# Altium PCB PCB1.PcbDoc
Units mil, origin at the board's own origin, x right, y up, seen from the top; angles counter-clockwise.
Board outline 2045 x 2310 mil, 2 copper layers (Top Layer, Bottom Layer); 30 components, 12 nets, 89 pads, 280 vias.
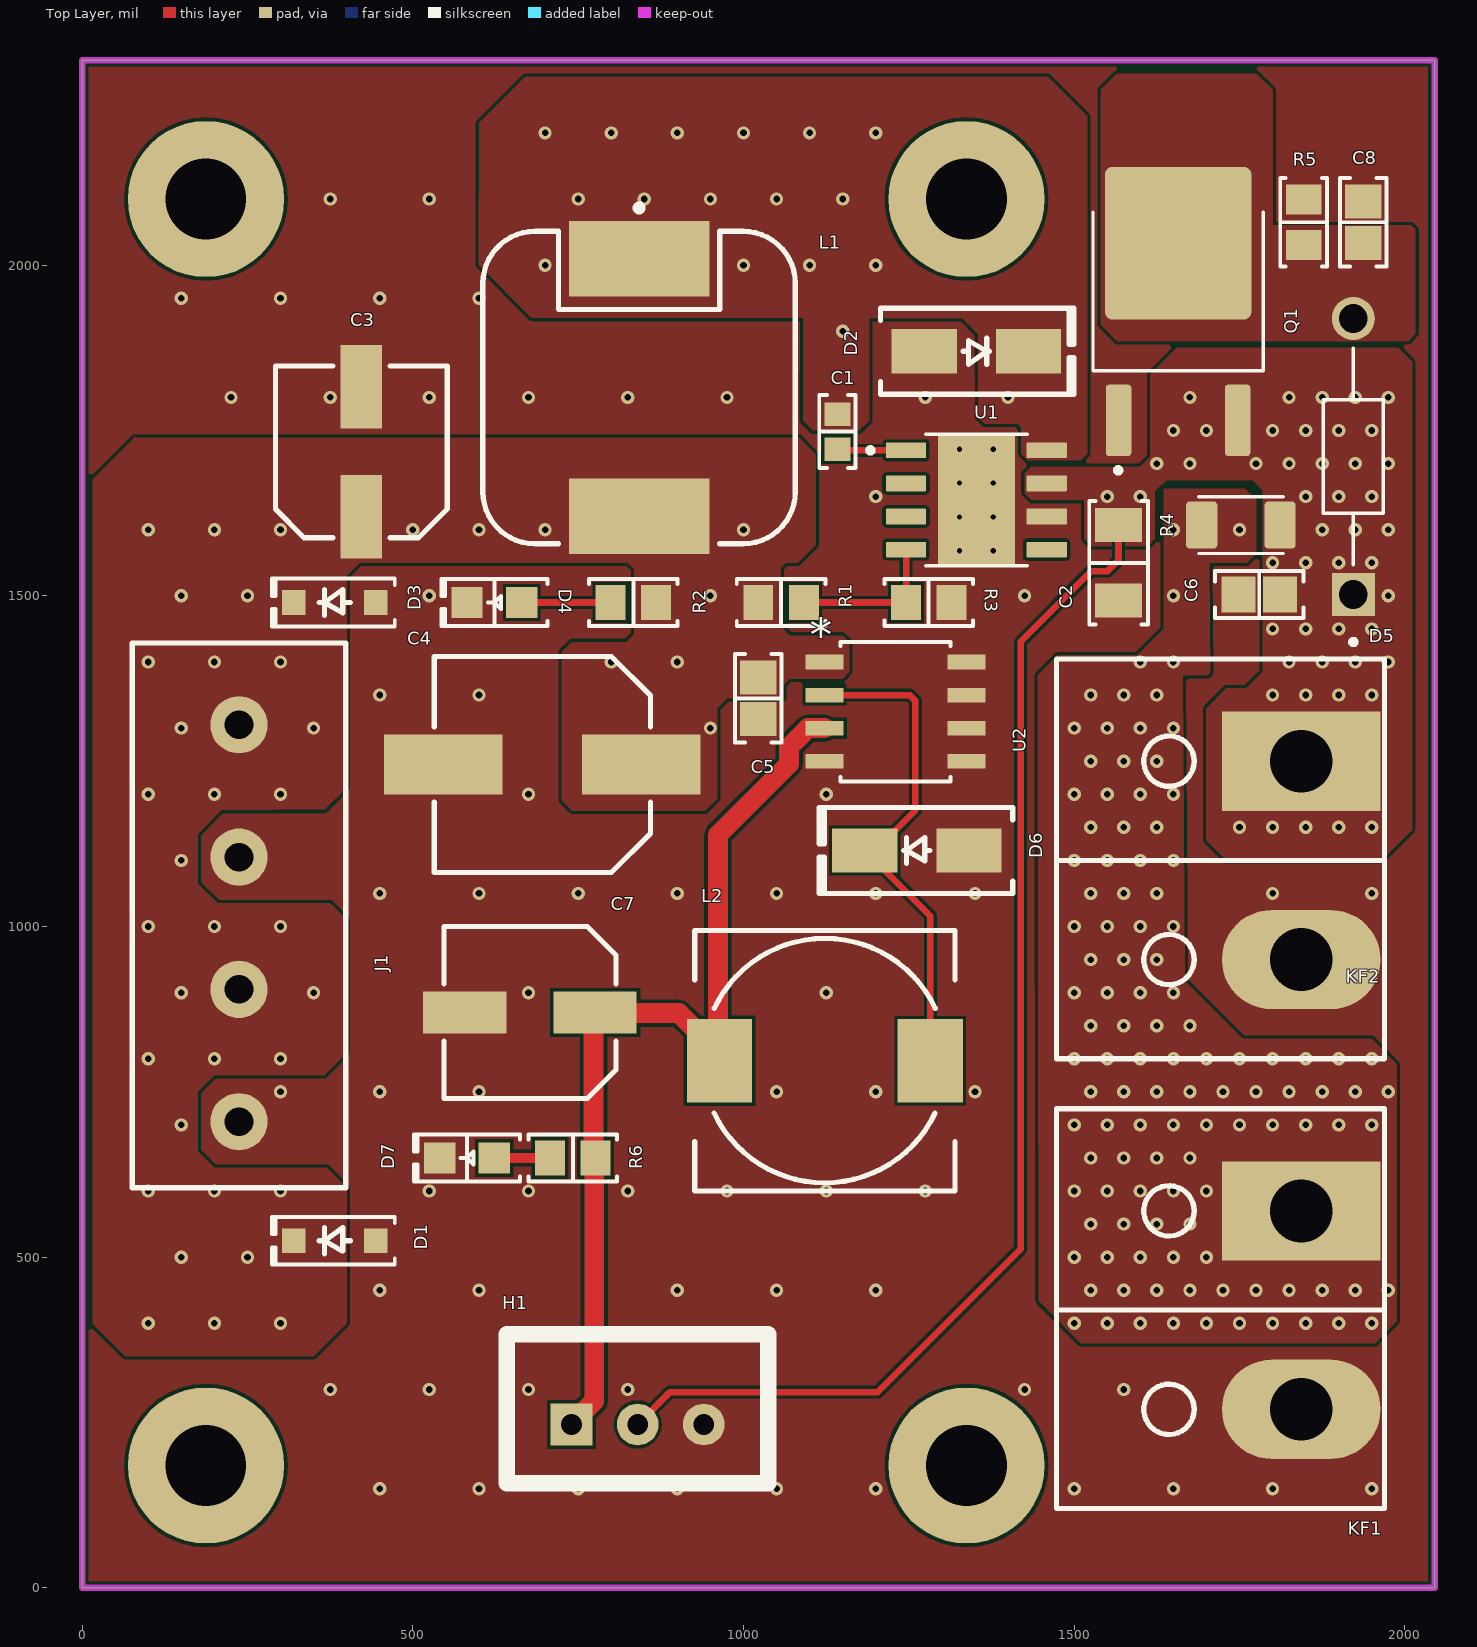
[diagram p0: Top Layer view]
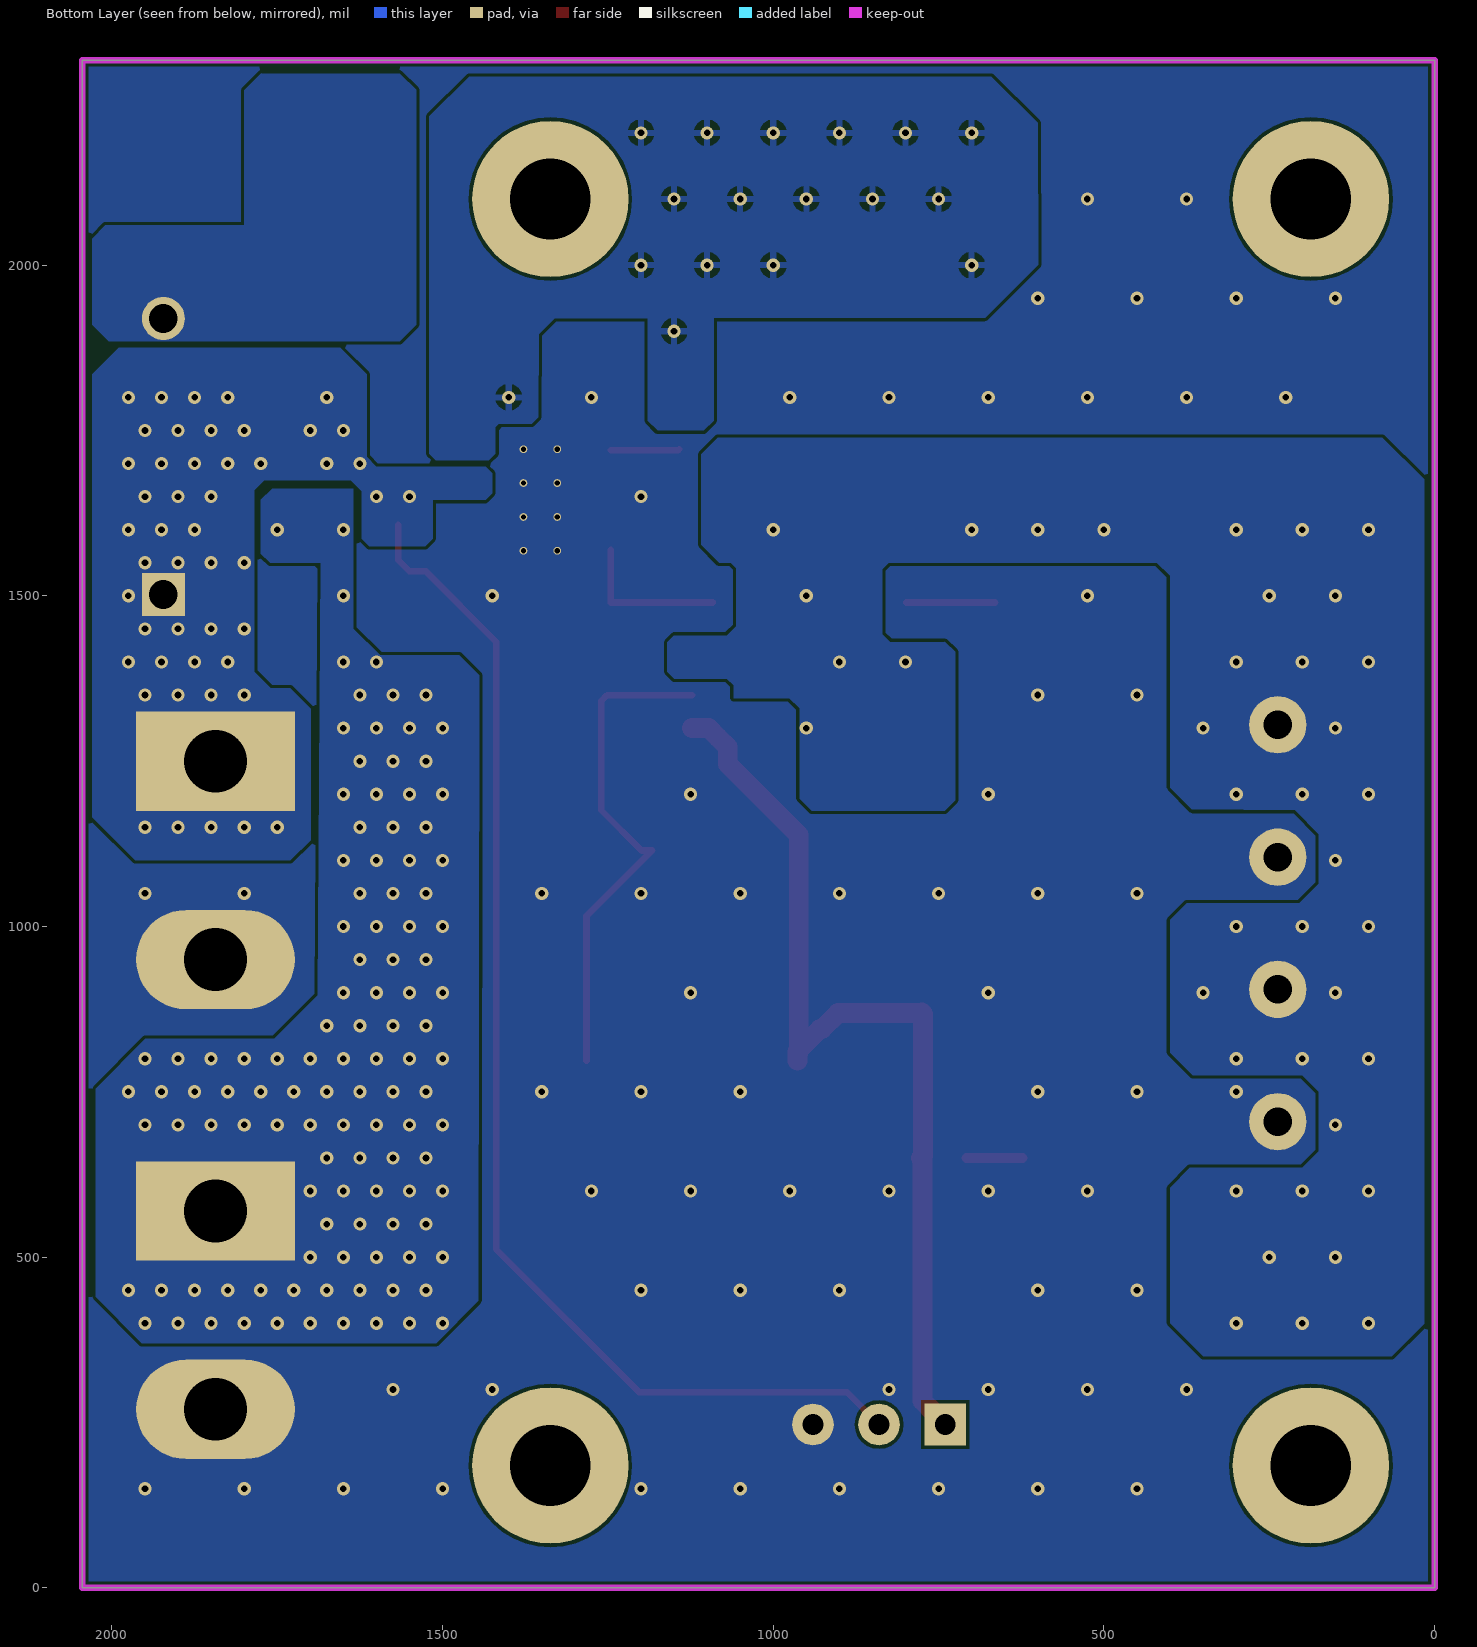
[diagram p1: Bottom Layer view, seen from below]
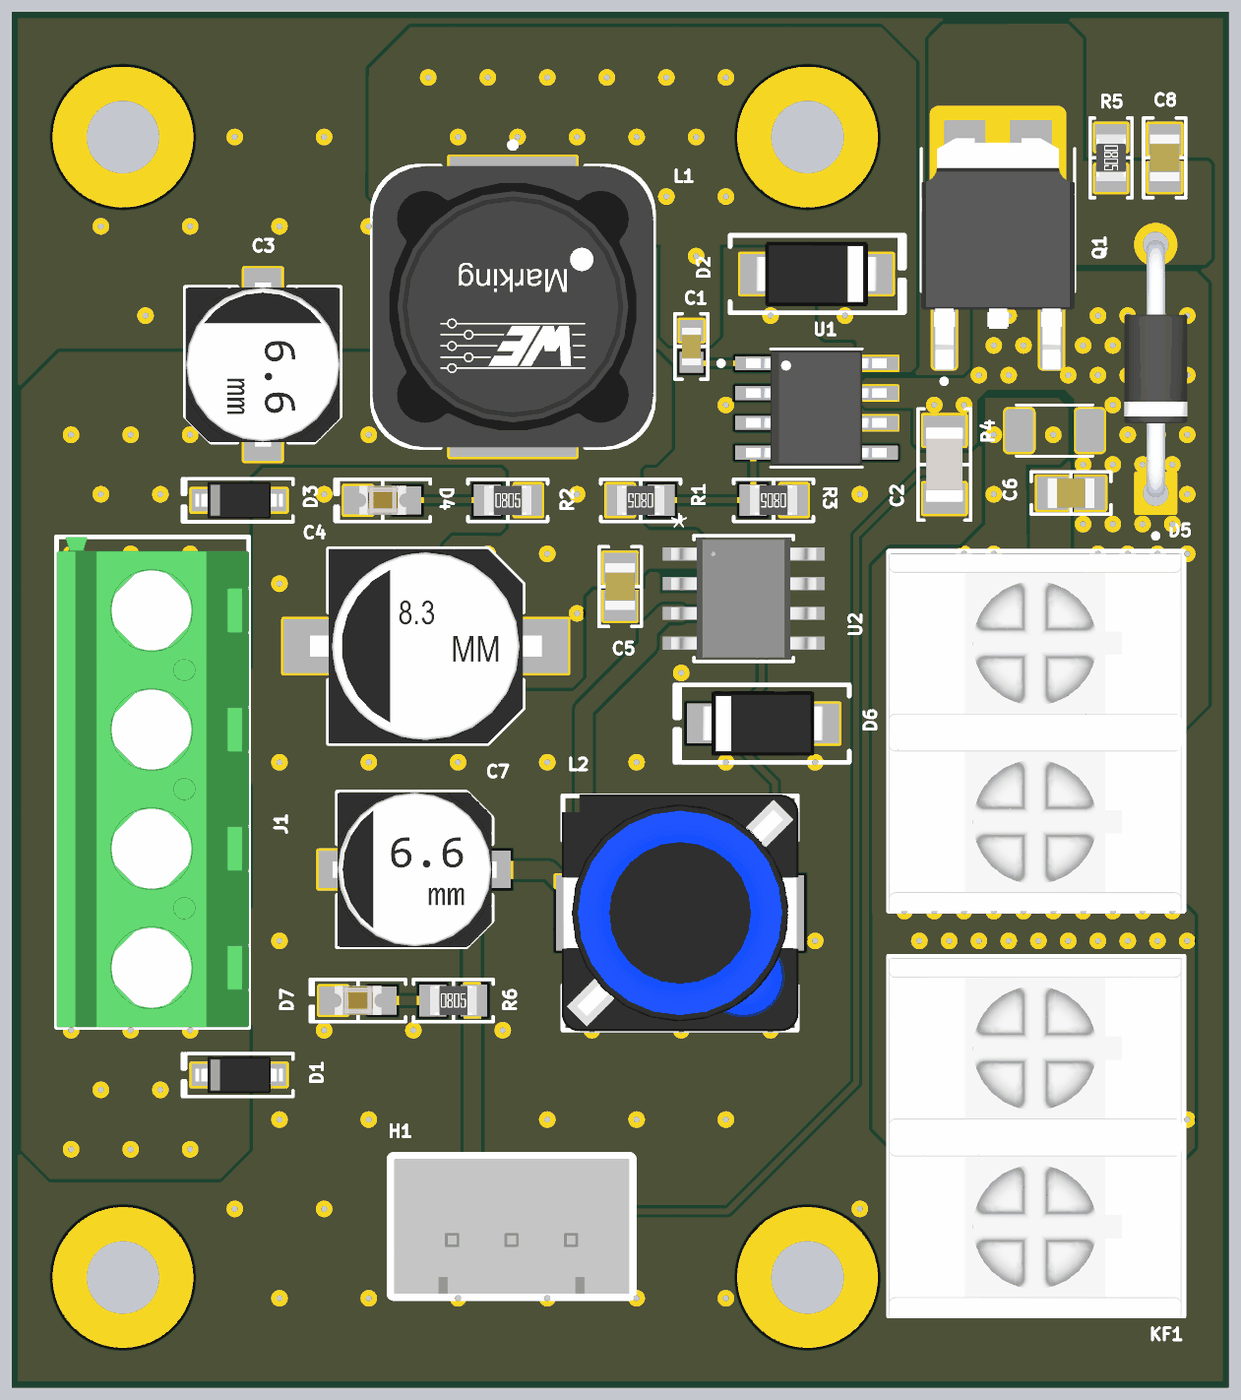
[diagram p2: 3D render of the assembled board from above, using the file's embedded part models]

## Layer stack, top to bottom
Top Solder: solder mask 0.4, Solder Resist, Dk 3.5
Top Layer: signal copper 1.4
Dielectric 1: dielectric 12.6, FR-4, Dk 4.8
Bottom Layer: signal copper 1.4
Bottom Solder: solder mask 0.4, Solder Resist, Dk 3.5

## Board outline
0,0 2045,0 2045,2310 0,2310

## Design rules (kind name [scope] priority, off if disabled: settings)
Clearance [All] p1: gap=5 ignorepadtopadclearanceinfootprint=FALSE
PolygonConnect PolygonConnect_17 [All vs IsNamedPolygon('GND_L02_P017')] p1: connectstyle=Direct reliefconductorwidth=10 reliefentries=4 polygonreliefangle="90 Angle" airgapwidth=10
PolygonConnect PolygonConnect_16 [All vs IsNamedPolygon('GND_L01_P016')] p2: connectstyle=Direct reliefconductorwidth=10 reliefentries=4 polygonreliefangle="90 Angle" airgapwidth=10
PolygonConnect PolygonConnect_15 [All vs IsNamedPolygon('NETD6_2_L01_P015')] p3: connectstyle=Direct reliefconductorwidth=10 reliefentries=4 polygonreliefangle="90 Angle" airgapwidth=10
PolygonConnect PolygonConnect_14 [All vs IsNamedPolygon('+25_L02_P013')] p4: connectstyle=Direct reliefconductorwidth=10 reliefentries=4 polygonreliefangle="90 Angle" airgapwidth=10
PolygonConnect PolygonConnect_13 [All vs IsNamedPolygon('+25_L01_P012')] p5: connectstyle=Direct reliefconductorwidth=10 reliefentries=4 polygonreliefangle="90 Angle" airgapwidth=10
PolygonConnect PolygonConnect_12 [All vs IsNamedPolygon('+25_V_L02_P011')] p6: connectstyle=Direct reliefconductorwidth=10 reliefentries=4 polygonreliefangle="90 Angle" airgapwidth=10
PolygonConnect PolygonConnect_11 [All vs IsNamedPolygon('+12_L02_P010')] p7: connectstyle=Direct reliefconductorwidth=10 reliefentries=4 polygonreliefangle="90 Angle" airgapwidth=10
PolygonConnect PolygonConnect_10 [All vs IsNamedPolygon('+12_L01_P009')] p8: connectstyle=Direct reliefconductorwidth=10 reliefentries=4 polygonreliefangle="90 Angle" airgapwidth=10
PolygonConnect PolygonConnect_9 [All vs IsNamedPolygon('NETC1_2_L01_P007')] p9: connectstyle=Direct reliefconductorwidth=10 reliefentries=4 polygonreliefangle="90 Angle" airgapwidth=10
PolygonConnect PolygonConnect_8 [All vs IsNamedPolygon('NETC1_2_L01_P005')] p10: connectstyle=Direct reliefconductorwidth=10 reliefentries=4 polygonreliefangle="90 Angle" airgapwidth=10
PolygonConnect PolygonConnect_7 [All vs IsNamedPolygon('NETC8_2_L02_P004')] p11: connectstyle=Direct reliefconductorwidth=10 reliefentries=4 polygonreliefangle="90 Angle" airgapwidth=10
PolygonConnect PolygonConnect_6 [All vs IsNamedPolygon('+25_V_L02_P002')] p12: connectstyle=Direct reliefconductorwidth=10 reliefentries=4 polygonreliefangle="90 Angle" airgapwidth=10
PolygonConnect PolygonConnect_5 [All vs IsNamedPolygon('+25_V_L02_P002')] p13: connectstyle=Direct reliefconductorwidth=10 reliefentries=4 polygonreliefangle="90 Angle" airgapwidth=10
PolygonConnect PolygonConnect_4 [All vs IsNamedPolygon('NETC8_2_L01_P003')] p14: connectstyle=Direct reliefconductorwidth=10 reliefentries=4 polygonreliefangle="90 Angle" airgapwidth=10
PolygonConnect PolygonConnect_3 [All vs IsNamedPolygon('+25_V_L02_P002')] p15: connectstyle=Direct reliefconductorwidth=10 reliefentries=4 polygonreliefangle="90 Angle" airgapwidth=10
PolygonConnect PolygonConnect_2 [All vs IsNamedPolygon('+25_V_L02_P001')] p16: connectstyle=Direct reliefconductorwidth=10 reliefentries=4 polygonreliefangle="90 Angle" airgapwidth=10
PolygonConnect PolygonConnect_1 [All vs IsNamedPolygon('+25_V_L01_P000')] p17: connectstyle=Direct reliefconductorwidth=10 reliefentries=4 polygonreliefangle="90 Angle" airgapwidth=10
PolygonConnect [All] p18: connectstyle=Relief reliefconductorwidth=10 reliefentries=4 polygonreliefangle="90 Angle" airgapwidth=10
RoutingVias [All] p1: holewidth=10 width=25 viastyle="Through Hole" minholewidth=5 minwidth=10 maxholewidth=15 maxwidth=50
SolderMaskExpansion [All] p1: expansion=4 istentingtop=FALSE
Width [All] p1: maxlimit=50 minlimit=7 preferedwidth=10 minimp=50.000000 maximp=50.000000 favimp=50.000000
30 further rules are at their usual default settings.

## Components (designator, comment, footprint, x,y, rotation, side; value= is the part's Value field where it differs from the comment)
C1 "10000 pF" "CAP 0603_1608" 1142.11,1748.28 r90 top
C2 "10 µF" "CAP 1206_3216 - 0.8MM" 1567.11,1549.94 r90 top
C3 "220 µF" "CAP ALSMD 6.6MM H6.1MM" 422.11,1717.77 r90 top
C4 "470 µF" "CAP ALSMD 8.3MM H10.5MM" 695.8,1244.94 r180 top
C5 "1 µF" "CAP 0805_2012" 1022.34,1345 r90 top
C6 "0.1µF" "CAP 0805_2012" 1779.87,1502.02 r0 top
C7 "180 µF" "CAP ALSMD 6.6MM H8.0MM" 677.11,869.94 r180 top
C8 "0.1µF" "CAP 0805_2012" 1937.11,2064.94 r270 top
D1 "1N5819HW-7-F" SOD-123 382.11,524.94 r180 top
D2 "SS34-HF" "DO214AC SMA" 1352.11,1869.94 r0 top
D3 "1N5819HW-7-F" SOD-123 382.11,1489.94 r180 top
D4 "Red" "LED 0805_2012 RED" 623.45,1489.94 r180 top
D5 "1N4750A" DIOAD1060W70L435D230 1922.11,1710.68 r90 top
D6 "SS24-HF" "DO214AC SMA" 1262.11,1114.94 r180 top
D7 "Red" "LED 0805_2012 RED" 581.9,649.94 r180 top
H1 "Header 3P 2.54 Duc Thang" XH2.54M-3 740,247 r0 top
J1 "282837-4" "TE 282837-4" 237.11,1004.94 r90 top
KF1 "CON 2 KF7.62" "CON 2 KF7.62" 1843.37,567.94 r270 top
KF2 "CON 2 KF7.62" "CON 2 KF7.62" 1843.37,1247.94 r270 top
L1 "22 µH" "WURTH WE-PD 1260" 842.11,1814.94 r270 top
L2 "68 µH" "TDK SLF10145" 1123,797 r0 top
Q1 "TN815-600B-TR" DPAK228P987X240-3N 1657.11,1929.94 r0 top
R1 "10 kOhms" "RES 0805_2012" 1056.79,1489.94 r180 top
R2 "680 Ohms" "RES 0805_2012" 833.59,1489.94 r0 top
R3 "1.1 kOhms" "RES 0805_2012" 1280,1490 r180 top
R4 "0ZCJ0020FF2E" RESC3216X125N 1752.11,1607.02 r0 top
R5 "1 kOhms" "RES 0805_2012" 1847.11,2064.94 r270 top
R6 "680 Ohms" "RES 0805_2012" 742.06,649.94 r0 top
U1 "TPS5430DDAR" CONV_TPS5430DDAR 1352.11,1644.94 r0 top
U2 "XL1509-5.0" SOP8SOIC-8_UMW 1229.86,1324.94 r0 top

## Footprints (in the part's own frame and the unit in brackets; to place one, negate y for a bottom-side part, rotate by r counter-clockwise, add the part's x,y. Pads: shape width x height; smd on the part's side, far side on the other; paste and mask are expansions set on the pad)
"CAP 0603_1608" [mm] "Chip Capacitor, 2-Leads, Body 1.60x0.80mm, IPC Medium Density"
  rect 0.9x1 smd: 1(-0.675,0) 2(0.675,0)
  silkscreen extent -1.4,-0.7 1.4,0.7, body extent -0.8,-0.41 0.8,0.41, height 0.82
"CAP 0805_2012" [mm] "Chip Capacitor, 2-Leads, Body 2.00x1.20mm, IPC Medium Density"
  rect 1.3x1.4 smd: 1(-0.8,0) 2(0.8,0)
  silkscreen extent -1.7,-0.9 1.7,0.9, body extent -1,-0.64 1,0.64, height 1.26
"CAP 1206_3216 - 0.8MM" [mm] "Chip Capacitor, 2-Leads, Body 3.25x1.60mm, IPC Medium Density"
  rect 1.3x1.8 smd: 1(-1.45,0) 2(1.45,0)
  silkscreen extent -2.37,-1.12 2.37,1.12, body extent -1.6,-0.8 1.6,0.8, height 0.8
"CAP ALSMD 6.6MM H6.1MM" [mm] "Aluminum Electrolytic Capacitor, Body 6.60x6.60x6.10mm, IPC Low Density"
  rect 3.2x1.6 smd: 1(-2.5,0) 2(2.5,0)
  silkscreen extent -3.3,-3.3 3.3,3.3, body extent -3.5,-3.3 3.5,3.3, height 6.1
"CAP ALSMD 6.6MM H8.0MM" [mm] "Aluminum Electrolytic Capacitor, Body 6.60x6.60x8.0mm, IPC Low Density"
  rect 3.2x1.6 smd: 1(-2.5,0) 2(2.5,0)
  silkscreen extent -3.3,-3.3 3.3,3.3, body extent -3.5,-3.3 3.5,3.3, height 8
"CAP ALSMD 8.3MM H10.5MM" [mm] "Aluminum Electrolytic Capacitor, Body 8.30x8.30x10.50mm, IPC Low Density"
  rect 4.55x2.3 smd: 1(-3.8,0) 2(3.8,0)
  silkscreen extent -4.15,-4.15 4.15,4.15, body extent -4.95,-4.15 4.95,4.15, height 10.5
"CON 2 KF7.62" [mil]
  rect 150x240 hole 95: 1(-2,0)
  oval 150x240 hole 95: 2(298,0)
  silkscreen extent -157,-370 448,126, body extent -152,-370 448,122, height 493
CONV_TPS5430DDAR [mm]
  rrect10% 1.55x0.6 smd mask+0: 1(-2.7,1.905) 2(-2.7,0.635) 3(-2.7,-0.635) 4(-2.7,-1.905) 5(2.7,-1.905) 6(2.7,-0.635) 7(2.7,0.635) 8(2.7,1.905)
  rect 2.95x4.9 smd paste-3 mask+0: 9(0,0)
  round 0.3 hole 0.2 mask+0: 10(-0.65,1.95) 11(0.65,1.95) 12(-0.65,0.65) 13(0.65,0.65) 14(-0.65,-0.65) 15(0.65,-0.65) 16(-0.65,-1.95) 17(0.65,-1.95)
  silkscreen extent -4.17,-2.52 1.95,2.52, body extent -3,-2.45 3,2.45, height 1.7
DIOAD1060W70L435D230 [mm]
  round 1.65 hole 1.1: A(5.3,0)
  rect 1.65x1.65 hole 1.1: C(-5.3,0)
  silkscreen extent -7.22,-1.15 4.16,1.15, body extent -5.47,-1.35 5.47,1.35, height 2.69
"DO214AC SMA" [mm] "Molded Diode, 2-Leads, Body 4.30x2.60mm, IPC Medium Density"
  rect 2.5x1.7 smd: 1(-2,0) 2(2,0)
  silkscreen extent -3.68,-1.65 3.75,1.65, body extent -2.6,-1.37 2.6,1.37, height 2.4
DPAK228P987X240-3N [mm]
  rrect25% 0.98x2.74 smd: 1(-2.286,-4.18) 2(2.286,-4.18)
  rrect10% 5.63x5.86 smd paste-4: 3(0,2.62)
  silkscreen extent -3.27,-6.2 3.27,3.83, body extent -3.27,-5.6 3.27,4.27, height 2.4
"LED 0805_2012 RED" [mm] "Chip Diode, 2-Leads, Body 2.00x1.25mm, IPC Medium Density"
  rect 1.2x1.2 smd: 1(-1.05,0) 2(1.05,0)
  silkscreen extent -2.03,-0.9 2.03,0.9, body extent -1,-0.62 1,0.63, height 0.9
"RES 0805_2012" [mm] "Chip Resistor, 2-Leads, Body 2.00x1.25mm, IPC Medium Density"
  rect 1.15x1.35 smd: 1(-0.875,0) 2(0.875,0)
  silkscreen extent -1.7,-0.9 1.7,0.9, body extent -1,-0.62 1,0.63, height 0.6
RESC3216X125N [mm]
  rrect25% 1.2x1.82 smd: 1(-1.505,0) 2(1.505,0)
  silkscreen extent -1.63,-1.09 1.63,1.09
SOD-123 [mm] "SOD, 2-Leads, Body 1.55x3.70mm, IPC Medium Density"
  rect 0.9x0.95 smd: 1(-1.575,0) 2(1.575,0)
  silkscreen extent -2.3,-0.92 2.41,0.92, body extent -1.86,-0.78 1.86,0.77, height 1.35
SOP8SOIC-8_UMW [mil]
  rect 57.5x22 smd paste+0 mask+0: 1(-107.25,75) 2(-107.25,25) 3(-107.25,-25) 4(-107.25,-75) 5(107.25,-75) 6(107.25,-25) 7(107.25,25) 8(107.25,75)
  silkscreen extent -84,-106 84,106, body extent -122,-101 122,101, height 69
"TDK SLF10145" [mm] "Precision Wire Wound Inductor, 2-Leads, Body 10.10x10.10mm, IPC Medium Density"
  rect 2.5x3.2 smd: 1(-4.05,0) 2(4.05,0)
  silkscreen extent -5,-5 5,5, body extent -5.05,-5.05 5.05,5.05, height 4.53
"TE 282837-4" [mm] "Wire to Board Terminal Block Horizontal with Board, 4 Postions, Body 20.92x8.2mm, Pitch 5.08mm"
  round 2.2 hole 1.1: 1(-7.62,0) 2(-2.54,0) 3(2.54,0) 4(7.62,0)
  silkscreen extent -10.16,-4.1 10.76,4.1, body extent -10.16,-4.1 10.76,4.1, height 10.3
"WURTH WE-PD 1260" [mm] "SMT Shielded Power Inductor, 2-leads, body 12x12mm"
  rect 2.9x5.4 smd: 1(-4.95,0) 2(4.95,0)
  silkscreen extent -7.02,-6 6,6, body extent -6,-6 6,6, height 5.66
XH2.54M-3 [mm]
  rect 1.6x1.6 hole 0.8: 1(0,0)
  round 1.6 hole 0.8: 2(2.54,0) 3(5.08,0)
  silkscreen extent -2.48,-2.26 7.56,3.46, body extent -2.48,-2.26 7.56,3.48, height 6.91

## Part data
C1: library part C0603C103K4REC7867, "CAP CER 0603 10NF 16V X7R 10%", Device Package="0603 (1608 Metric)", Manufacturer=KEMET, Operating Temperature="-55°C ~ 125°C", Supplier Part Number 1=399-C0603C103K4REC7867CT-ND, Temperature Coefficient=X7R, Tolerance=±10%, Voltage - Rated=16V, Applications="ESD Protection", Capacitance="10000 pF", componentlink1description=Datasheet, componentlink1url=https://api.kemet.com/component-edge/download/datasheet/C0603C103K4REC7867.pdf, componentlink2description="DigiKey Link", componentlink2url=https://www.digikey.com/en/products/detail/kemet/C0603C103K4REC7867/8643658, lastupdated="2/9/2024 8:09:56 PM", Lifecycle Status=Active, Minimum Order=1, Mounting Type="Surface Mount, MLCC", Package / Case="0603 (1608 Metric)", packaging=TapeAndReel, Part Number=C0603C103K4REC7867, Part Status=Active, partid=34998, Price=0.01, series="ESD SMD Comm X7R", Size / Dimension="0.063\" L x 0.031\" W (1.60mm x 0.80mm)", Supplier 1=DigiKey, Thickness (Max)="0.034\" (0.87mm)"
C2: library part 885012108022, "CAP CER 10UF 50V X5R 1206", Device Package="1206 (3216 Metric)", Manufacturer="Würth Elektronik", Operating Temperature="-55°C ~ 85°C", Supplier Part Number 1=732-885012108022CT-ND, Temperature Coefficient=X5R, Tolerance=±10%, Voltage - Rated=50V, Applications="General Purpose", Capacitance="10 µF", componentlink1description=Datasheet, componentlink1url=https://www.we-online.com/catalog/datasheet/885012108022.pdf, componentlink2description="DigiKey Link", componentlink2url=https://www.digikey.com/en/products/detail/würth-elektronik/885012108022/17829827, lastupdated="6/4/2024 7:10:08 PM", Lifecycle Status=Active, Minimum Order=1, Mounting Type="Surface Mount, MLCC", Package / Case="1206 (3216 Metric)", packaging=TapeAndReel, Part Number=885012108022, Part Status=Active, partid=49462, Price=1.51, series=WCAP-CSGP, Size / Dimension="0.126\" L x 0.063\" W (3.20mm x 1.60mm)", Supplier 1=DigiKey, Thickness (Max)="0.071\" (1.80mm)"
C3: library part EEE-FT1C221AL, "CAP ALUM 220UF 20% 16V SMD", ESR (Equivalent Series Resistance)="260mOhm @ 100kHz", Lifetime @ Temp.="2000 Hrs @ 105°C", Manufacturer="Panasonic Electronic Components", Operating Temperature="-55°C ~ 105°C", Ratings=AEC-Q200, Ripple Current @ High Frequency="300 mA @ 100 kHz", Ripple Current @ Low Frequency="195 mA @ 120 Hz", Supplier Part Number 1=10-EEE-FT1C221ALCT-ND, Tolerance=±20%, Voltage - Rated="16 V", Applications=Automotive, Capacitance="220 µF", componentlink1description=Datasheet, componentlink1url=https://na.industrial.panasonic.com/file-download/19625, componentlink2description="DigiKey Link", componentlink2url=https://www.digikey.com/en/products/detail/panasonic-electronic-components/EEE-FT1C221AL/12459640, Height - Seated (Max)="0.240\" (6.10mm)", lastupdated="6/3/2024 8:16:06 PM", Lifecycle Status=Active, Minimum Order=1, Mounting Type="Surface Mount", packaging=TapeAndReel, Part Number=EEE-FT1C221AL, partid=28448, Polarization=Polar, Price=0.16, series="FT, Halogen Free", Size / Dimension="0.248\" Dia (6.30mm)", Supplier 1=DigiKey, Surface Mount Land Size="0.260\" L x 0.260\" W (6.60mm x 6.60mm)"
C4: library part EMZS350ARA471MHA0G, "CAP ALUM 470UF 20% 35V SMD", Device Package="Radial, Can - SMD", ESR (Equivalent Series Resistance)="80mOhm @ 100kHz", Lifetime @ Temp.="2000 Hrs @ 105°C", Manufacturer="United Chemi-Con", Operating Temperature="-55°C ~ 105°C", Ratings=AEC-Q200, Ripple Current @ High Frequency="850 mA @ 100 kHz", Ripple Current @ Low Frequency="425 mA @ 120 Hz", Supplier Part Number 1=565-5123-1-ND, Tolerance=±20%, Voltage - Rated="35 V", Applications=Automotive, Capacitance="470 µF", componentlink1description=Datasheet, componentlink1url=//media.digikey.com/pdf/Data%20Sheets/United%20Chemi-Con%20PDFs/MZS_Series_NPI.pdf, componentlink2description="DigiKey Link", componentlink2url=https://www.digikey.com/en/products/detail/united-chemi-con/EMZS350ARA471MHA0G/8637079, Height - Seated (Max)="0.413\" (10.50mm)", lastupdated="6/3/2024 8:15:48 PM", Lifecycle Status=Active, Minimum Order=1, Mounting Type="Surface Mount", Package / Case="Radial, Can - SMD", packaging=TapeAndReel, Part Number=EMZS350ARA471MHA0G, Part Status=Active, partid=7526, Polarization=Polar, Price=0.40, series="Alchip™- MZS", Size / Dimension="0.315\" Dia (8.00mm)", Supplier 1=DigiKey, Surface Mount Land Size="0.327\" L x 0.327\" W (8.30mm x 8.30mm)"
C5: library part C0805C105J4RECAUTO, "CAP CER 0805 1UF 16V X7R 5%", Device Package="0805 (2012 Metric)", Manufacturer=KEMET, Operating Temperature="-55°C ~ 125°C", Ratings=AEC-Q200, Supplier Part Number 1=399-C0805C105J4RECAUTOCT-ND, Temperature Coefficient=X7R, Tolerance=±5%, Voltage - Rated=16V, Applications="Automotive, ESD Protection", Capacitance="1 µF", componentlink1description=Datasheet, componentlink1url=https://api.kemet.com/component-edge/download/datasheet/C0805C105J4RECAUTO.pdf, componentlink2description="DigiKey Link", componentlink2url=https://www.digikey.com/en/products/detail/kemet/C0805C105J4RECAUTO/8646570, lastupdated="2/9/2024 8:15:08 PM", Lifecycle Status=Active, Minimum Order=1, Mounting Type="Surface Mount, MLCC", Package / Case="0805 (2012 Metric)", packaging=TapeAndReel, Part Number=C0805C105J4RECAUTO, Part Status=Active, partid=32406, Price=0.05, series="ESD SMD Auto X7R", Size / Dimension="0.079\" L x 0.049\" W (2.00mm x 1.25mm)", Supplier 1=DigiKey, Thickness (Max)="0.055\" (1.40mm)"
C6 C8: library part 0805DD104KAT2A, "CAP CER 0.1UF 35V X5R 0805", Device Package="0805 (2012 Metric)", Manufacturer="AVX Corporation", Operating Temperature="-55°C ~ 85°C", Supplier Part Number 1=478-0805DD104KAT2ACT-ND, Temperature Coefficient=X5R, Tolerance=±10%, Voltage - Rated=35V, Applications="General Purpose", Capacitance=0.1µF, componentlink1description=Datasheet, componentlink1url=http://datasheets.avx.com/cx5r.pdf, componentlink2description="DigiKey Link", componentlink2url=http://digikey.com/product-detail/en/avx-corporation/0805DD104KAT2A/478-0805DD104KAT2ACT-ND/11570416, lastupdated="9/2/2020 1:04:04 AM", Lifecycle Status=Active, Minimum Order=1, Mounting Type="Surface Mount, MLCC", Package / Case="0805 (2012 Metric)", packaging=TapeAndReel, Part Number=0805DD104KAT2A, Part Status=Active, partid=27785, Price=0.04, series=-, Supplier 1=DigiKey
C7: library part EEE-FKE181XSP, "CAP ALUM 180UF 20% 25V SMD", Device Package="Radial, Can - SMD", ESR (Equivalent Series Resistance)="340mOhm @ 100kHz", Lifetime @ Temp.="2000 Hrs @ 105°C", Manufacturer="Panasonic Electronic Components", Operating Temperature="-55°C ~ 105°C", Ratings=AEC-Q200, Ripple Current @ High Frequency="280 mA @ 100 kHz", Ripple Current @ Low Frequency="182 mA @ 120 Hz", Supplier Part Number 1=P18956CT-ND, Tolerance=±20%, Voltage - Rated="25 V", Applications=Automotive, Capacitance="180 µF", componentlink1description=Datasheet, componentlink1url=https://b2b-api.panasonic.eu/file_stream/pids/fileversion/3102, componentlink2description="DigiKey Link", componentlink2url=https://www.digikey.com/en/products/detail/panasonic-electronic-components/EEE-FKE181XSP/5805038, Height - Seated (Max)="0.315\" (8.00mm)", lastupdated="6/3/2024 8:16:27 PM", Lifecycle Status=Active, Minimum Order=1, Mounting Type="Surface Mount", Package / Case="Radial, Can - SMD", packaging=TapeAndReel, Part Number=EEE-FKE181XSP, Part Status=Active, partid=27654, Polarization=Polar, Price=0.22, series=FKS, Size / Dimension="0.248\" Dia (6.30mm)", Supplier 1=DigiKey, Surface Mount Land Size="0.260\" L x 0.260\" W (6.60mm x 6.60mm)"
D1 D3: "DIODE SCHOTTKY 40V 1A SOD123", Capacitance @ Vr, F="60pF @ 4V, 1MHz", Current - Average Rectified (Io)=1A, Current - Reverse Leakage @ Vr="1 mA @ 40 V", Manufacturer="Diodes Incorporated", Operating Temperature - Junction="-65°C ~ 125°C", Package / Case=SOD-123, Supplier Part Number 1=1N5819HW-FDICT-ND, Voltage - DC Reverse (Vr) (Max)="40 V", Voltage - Forward (Vf) (Max) @ If="450 mV @ 1 A", componentlink1description=Datasheet, componentlink1url=https://www.diodes.com/assets/Datasheets/ds30217.pdf, componentlink2description="DigiKey Link", componentlink2url=https://www.digikey.com/en/products/detail/diodes-incorporated/1N5819HW-7-F/814970, Diode Type=Schottky, lastupdated="6/3/2024 7:54:46 PM", Lifecycle Status=Active, Minimum Order=1, Mounting Type="Surface Mount", packaging=TapeAndReel, Part Number=1N5819HW-7-F, Part Status=Active, partid=2212, Price=0.05, series=-, Speed="Fast Recovery =< 500ns, > 200mA (Io)", Supplier 1=DigiKey, Supplier Device Package=SOD-123
D2: "DIODE SCHOTTKY 40V 3A DO214AC", Capacitance @ Vr, F="450pF @ 4V, 1MHz", Current - Average Rectified (Io)=3A, Current - Reverse Leakage @ Vr="500 µA @ 40 V", Manufacturer="Comchip Technology", Operating Temperature - Junction="-55°C ~ 125°C", Package / Case="DO-214AC, SMA", Supplier Device Package="DO-214AC (SMA)", Supplier Part Number 1=641-2115-1-ND, Voltage - DC Reverse (Vr) (Max)="40 V", Voltage - Forward (Vf) (Max) @ If="550 mV @ 3 A", componentlink1description=Datasheet, componentlink1url=http://www.comchiptech.com/admin/files/product/20190514101641.pdf, componentlink2description="DigiKey Link", componentlink2url=https://www.digikey.com/en/products/detail/comchip-technology/SS34-HF/10279693, Diode Type=Schottky, lastupdated="6/3/2024 7:54:30 PM", Lifecycle Status=Active, Minimum Order=1, Mounting Type="Surface Mount", packaging=TapeAndReel, Part Number=SS34-HF, Part Status=Active, partid=2138, Price=0.07, series=-, Speed="Fast Recovery =< 500ns, > 200mA (Io)", Supplier 1=DigiKey
D4 D7: library part B1701URO-20D000114U1930, "LED RED DIFFUSED 0805 SMD", Current - Test=20mA, Device Package="0805 (2012 Metric)", Manufacturer="Harvatek Corporation", Millicandela Rating=71.5mcd, Supplier Device Package=0805, Supplier Part Number 1=3147-B1701URO-20D000114U1930CT-ND, Voltage - Forward (Vf) (Typ)=2V, Color=Red, componentlink1description=Datasheet, componentlink1url=https://media.digikey.com/pdf/Data%20Sheets/Harvatek%20PDFs/B1701URO-20D000114U1930.pdf, componentlink2description="DigiKey Link", componentlink2url=https://www.digikey.com/en/products/detail/harvatek-corporation/B1701URO-20D000114U1930/16671739, Height (Max)=0.90mm, lastupdated="6/3/2024 8:00:05 PM", Lens Size="1.40mm x 1.30mm", Lens Style="Rectangle with Flat Top", Lens Transparency=Diffused, Lifecycle Status=Active, Minimum Order=1, Mounting Type="Surface Mount", Package / Case="0805 (2012 Metric)", packaging=TapeAndReel, Part Number=B1701URO-20D000114U1930, Part Status=Active, partid=1175, Price=0.09, series=B1701URO, Size / Dimension="2.00mm L x 1.30mm W", Supplier 1=DigiKey, Viewing Angle=130°, Wavelength - Dominant=631nm, Wavelength - Peak=639nm
D5: "1N4750 Series 1 W 27 V 5 uA Through Hole Zener Diode - DO-41", Package="DO-41 ON Semiconductor", Availability="In Stock", Check_prices=https://www.snapeda.com/parts/1N4750A/Fairchild+Semiconductor/view-part/?ref=eda, MF="Fairchild Semiconductor", MP=1N4750A, Price=None, Purchase-URL=https://pricing.snapeda.com/search/part/1N4750A/?ref=eda, SnapEDA_Link=https://www.snapeda.com/parts/1N4750A/Fairchild+Semiconductor/view-part/?ref=snap
D6: "DIODE SCHOTTKY 40V 2A DO214AC", Capacitance @ Vr, F="220pF @ 4V, 1MHz", Current - Average Rectified (Io)=2A, Current - Reverse Leakage @ Vr="500 µA @ 40 V", Manufacturer="Comchip Technology", Operating Temperature - Junction="-55°C ~ 150°C", Package / Case="DO-214AC, SMA", Supplier Device Package="DO-214AC (SMA)", Supplier Part Number 1=641-SS24-HFCT-ND, Voltage - DC Reverse (Vr) (Max)="40 V", Voltage - Forward (Vf) (Max) @ If="550 mV @ 2 A", componentlink1description=Datasheet, componentlink1url=http://www.comchiptech.com/admin/files/product/20190621155523.PDF, componentlink2description="DigiKey Link", componentlink2url=https://www.digikey.com/en/products/detail/comchip-technology/SS24-HF/10443640, Diode Type=Schottky, lastupdated="6/3/2024 7:54:32 PM", Lifecycle Status=Active, Minimum Order=1, Mounting Type="Surface Mount", packaging=TapeAndReel, Part Number=SS24-HF, Part Status=Active, partid=2029, Price=0.05, series=-, Speed="Fast Recovery =< 500ns, > 200mA (Io)", Supplier 1=DigiKey
H1 KF1 KF2: "Cắm", Chung_Loai=Cắm, Don_Vi=Con
  H1: Ma_Hang=MH001292, Ten_Linh_Kien="Header 3P XH2.54-3P Đực Thẳng"
  KF1 KF2: Ma_Hang=MH002053, Ten_Linh_Kien="CON 2 KF7.62-2P 7.62MM (Đen Thẳng)"
J1: "TERM BLK 4P SIDE ENT 5.08MM PCB", Color=Green, Current="13.5 A", Manufacturer="TE Connectivity AMP Connectors", Supplier Part Number 1=A124423-ND, Voltage="300 V", componentlink1description=Datasheet, componentlink1url=https://www.te.com/commerce/DocumentDelivery/DDEController?Action=srchrtrv&DocNm=282837&DocType=Customer+Drawing&DocLang=English, componentlink2description="DigiKey Link", componentlink2url=https://www.digikey.com/en/products/detail/te-connectivity-amp-connectors/282837-4/2187975, Features="Interlocking (Side)", lastupdated="6/21/2022 3:00:53 PM", Lifecycle Status=Active, Mating Orientation="Horizontal with Board", Minimum Order=1, Mounting Type="Through Hole", Number of Levels=1, packaging=Tray, Part Number=282837-4, Part Status=Active, Pitch="0.200\" (5.08mm)", Positions Per Level=4, Price=0.62, series=Buchanan, Supplier 1=DigiKey, Wire Gauge="16-28 AWG", Wire Termination="Screw - Rising Cage Clamp"
L1: library part 744771122, "FIXED IND 22UH 3.37A 36 MOHM SMD", Current - Saturation=3.77A, Current Rating (Amps)="3.37 A", DC Resistance (DCR)="36mOhm Max", Device Package=Nonstandard, Frequency - Self Resonant=13.5MHz, Inductance Frequency - Test="1 kHz", Manufacturer="Würth Elektronik", Operating Temperature="-40°C ~ 125°C", Ratings=AEC-Q200, Supplier Part Number 1=732-1211-1-ND, Tolerance=±20%, componentlink1description=Datasheet, componentlink1url=https://katalog.we-online.de/pbs/datasheet/744771122.pdf, componentlink2description="DigiKey Link", componentlink2url=https://www.digikey.com/en/products/detail/würth-elektronik/744771122/1638616, Height - Seated (Max)="0.236\" (6.00mm)", Inductance="22 µH", lastupdated="6/3/2024 8:26:19 PM", Lifecycle Status=Active, Material - Core=Ferrite, Minimum Order=1, Mounting Type="Surface Mount", Package / Case=Nonstandard, packaging=TapeAndReel, Part Number=744771122, Part Status=Active, partid=5724, Price=1.18, series=WE-PD, Shielding=Shielded, Size / Dimension="0.472\" L x 0.472\" W (12.00mm x 12.00mm)", Supplier 1=DigiKey, Type="Drum Core, Wirewound"
L2: library part SLF10145T-680M1R2-PF, "FIXED IND 68UH 1.3A 168 MOHM SMD", Current - Saturation=1.2A, Current Rating (Amps)="1.3 A", DC Resistance (DCR)="168mOhm Max", Device Package=Nonstandard, Inductance Frequency - Test="1 kHz", Manufacturer="TDK Corporation", Operating Temperature="-40°C ~ 105°C", Supplier Part Number 1=445-1987-1-ND, Tolerance=±20%, componentlink1description=Datasheet, componentlink1url=https://product.tdk.com/info/en/catalog/datasheets/inductor_commercial_power_slf10145_en.pdf?ref_disty=digikey, componentlink2description="DigiKey Link", componentlink2url=https://www.digikey.com/en/products/detail/tdk-corporation/SLF10145T-680M1R2-PF/755339, Height - Seated (Max)="0.189\" (4.80mm)", Inductance="68 µH", lastupdated="7/12/2023 8:19:31 PM", Lifecycle Status=Active, Material - Core=Ferrite, Minimum Order=1, Mounting Type="Surface Mount", Package / Case=Nonstandard, packaging=TapeAndReel, Part Number=SLF10145T-680M1R2-PF, Part Status=Active, partid=81, Price=0.44, series=SLF, Shielding=Shielded, Size / Dimension="0.398\" L x 0.398\" W (10.10mm x 10.10mm)", Supplier 1=DigiKey, Type="Drum Core, Wirewound"
Q1: "No Description Available", Mfr_Name=STMicroelectronics, RefDes=RefDes, Type=Type
R1: library part ERJ-UP6J103V, "RES 10K OHM 5% 1/2W 0805", Device Package="0805 (2012 Metric)", Manufacturer="Panasonic Electronic Components", Operating Temperature="-55°C ~ 155°C", Power (Watts)="0.5W, 1/2W", Ratings=AEC-Q200, Supplier Device Package=0805, Supplier Part Number 1=10-ERJ-UP6J103VCT-ND, Temperature Coefficient=±200ppm/°C, Tolerance=±5%, componentlink1description=Datasheet, componentlink1url=https://api.pim.na.industrial.panasonic.com/file_stream/main/fileversion/4484, componentlink2description="DigiKey Link", componentlink2url=https://www.digikey.com/en/products/detail/panasonic-electronic-components/ERJ-UP6J103V/8134737, Composition="Thick Film", Features="Anti-Sulfur, Automotive AEC-Q200, Pulse Withstanding", Height - Seated (Max)="0.028\" (0.70mm)", lastupdated="2/8/2024 9:00:07 PM", Lifecycle Status=Active, Minimum Order=1, Number of Terminations=2, Package / Case="0805 (2012 Metric)", packaging=TapeAndReel, Part Number=ERJ-UP6J103V, Part Status=Active, partid=76882, Price=0.02, Resistance="10 kOhms", series=ERJ-UP6, Size / Dimension="0.079\" L x 0.049\" W (2.00mm x 1.25mm)", Supplier 1=DigiKey
R2 R6: library part ERA-6AEB681V, "RES SMD 680 OHM 0.1% 1/8W 0805", Device Package="0805 (2012 Metric)", Manufacturer="Panasonic Electronic Components", Operating Temperature="-55°C ~ 155°C", Power (Watts)="0.125W, 1/8W", Ratings=AEC-Q200, Supplier Device Package=0805, Supplier Part Number 1=P680DACT-ND, Temperature Coefficient=±25ppm/°C, Tolerance=±0.1%, componentlink1description=Datasheet, componentlink1url=https://industrial.panasonic.com/cdbs/www-data/pdf/RDM0000/AOA0000C307.pdf, componentlink2description="DigiKey Link", componentlink2url=https://www.digikey.com/en/products/detail/panasonic-electronic-components/ERA-6AEB681V/1465744, Composition="Thin Film", Features="Automotive AEC-Q200", Height - Seated (Max)="0.024\" (0.60mm)", lastupdated="2/8/2024 9:00:55 PM", Lifecycle Status=Active, Minimum Order=1, Number of Terminations=2, Package / Case="0805 (2012 Metric)", packaging=TapeAndReel, Part Number=ERA-6AEB681V, Part Status=Active, partid=48903, Price=0.03, Resistance="680 Ohms", series=ERA-6A, Size / Dimension="0.079\" L x 0.049\" W (2.00mm x 1.25mm)", Supplier 1=DigiKey
R3: library part ERA-6APB112V, "RES SMD 1.1K OHM 0.1% 1/8W 0805", Device Package="0805 (2012 Metric)", Manufacturer="Panasonic Electronic Components", Operating Temperature="-55°C ~ 155°C", Power (Watts)="0.125W, 1/8W", Ratings=AEC-Q200, Supplier Device Package=0805, Supplier Part Number 1=P1.1KAZCT-ND, Temperature Coefficient=±15ppm/°C, Tolerance=±0.1%, componentlink1description=Datasheet, componentlink1url=https://industrial.panasonic.com/cdbs/www-data/pdf/RDM0000/AOA0000C307.pdf, componentlink2description="DigiKey Link", componentlink2url=https://www.digikey.com/en/products/detail/panasonic-electronic-components/ERA-6APB112V/3070681, Composition="Thin Film", Features="Automotive AEC-Q200", Height - Seated (Max)="0.024\" (0.60mm)", lastupdated="2/8/2024 9:02:01 PM", Lifecycle Status=Active, Minimum Order=1, Number of Terminations=2, Package / Case="0805 (2012 Metric)", packaging=TapeAndReel, Part Number=ERA-6APB112V, Part Status=Active, partid=36576, Price=0.15, Resistance="1.1 kOhms", series=ERA-6A, Size / Dimension="0.079\" L x 0.049\" W (2.00mm x 1.25mm)", Supplier 1=DigiKey
R4: "1206 SMT PPTC", Package="1206 Bel Fuse", Availability=Unavailable, DigiKey-Purchase-URL=https://snapeda.com/shop?store=DigiKey&id=430609, MF="Bel Fuse", MP=0ZCJ0020FF2E, Price=None, SnapEDA_Link=https://www.snapeda.com/parts/0ZCJ0020FF2E/Bel%20Fuse%20Inc./view-part/430609/?ref=snap
R5: library part CPF0805B1K0E1, "RES SMD 1K OHM 0.1% 1/10W 0805", Device Package="0805 (2012 Metric)", Manufacturer="TE Connectivity Passive Product", Operating Temperature="-55°C ~ 155°C", Power (Watts)="0.1W, 1/10W", Supplier Device Package=0805, Supplier Part Number 1=A103165CT-ND, Temperature Coefficient=±25ppm/°C, Tolerance=±0.1%, componentlink1description=Datasheet, componentlink1url=https://www.te.com/commerce/DocumentDelivery/DDEController?Action=srchrtrv&DocNm=1773200&DocType=DS&DocLang=English, componentlink2description="DigiKey Link", componentlink2url=https://www.digikey.com/en/products/detail/te-connectivity-passive-product/CPF0805B1K0E1/2382031, Composition="Thin Film", Height - Seated (Max)="0.026\" (0.65mm)", lastupdated="2/8/2024 9:00:53 PM", Lifecycle Status=Active, Minimum Order=1, Number of Terminations=2, Package / Case="0805 (2012 Metric)", packaging=TapeAndReel, Part Number=CPF0805B1K0E1, Part Status=Active, partid=49078, Price=0.12, Resistance="1 kOhms", series="CPF, Neohm", Size / Dimension="0.079\" L x 0.049\" W (2.00mm x 1.25mm)", Supplier 1=DigiKey
U1: "5.5V to 36V Input, 3A, 500kHz Step-Down Converter", Package="HSOIC-8 Texas Instruments", Availability="In Stock", Check_prices=https://www.snapeda.com/parts/TPS5430DDAR/Texas+Instruments/view-part/?ref=eda, MF="Texas Instruments", MP=TPS5430DDAR, Price=None, Purchase-URL=https://pricing.snapeda.com/search/part/TPS5430DDAR/?ref=eda, SnapEDA_Link=https://www.snapeda.com/parts/TPS5430DDAR/Texas+Instruments/view-part/?ref=snap
U2: "No Description Available", Mfr_Name="UMW(Youtai Semiconductor Co., Ltd.)", RefDes=RefDes, Type=Type

## Free pads (board coordinates)
  round 236.22 hole 122.05: 9(187.11,184.94) 9(187.11,2099.94) 9(1337.11,184.94) 9(1337.11,2099.94)

## Via types
v1: diameter 20, hole 10, Top Layer to Bottom Layer, 280 vias

## Nets (pads, with @x,y where several pads share a name; then routed paths per layer and width w, separated by ;. In a path a pad name is that pad's centre, name@x,y a point inside that pad or via, vN(x,y) a via of type N, cw(c..) or ccw(c..) an arc to the next point about the centre after c; other vN are vias at no path point)
+5: C7.1 H1.1 L2.1 R6.2 U2.3 | length 1438.2
  Top Layer w30: H1.1 756.5,263.5 756.5,264.68 774.36,282.54 774.36,647.79 R6.2 773.38,653.06 773.38,867.79 C7.1 776.51,868.97 902.24,868.97 926.22,844.99 929.34,844.99 963.55,810.78 L2.1 ; L2.1@961.4,809.81 961.4,1138.4 1068.86,1245.86 1068.86,1271.29 1083.5,1285.94 1097.51,1299.94 U2.3
+12: C3.1 C4.1 C5.2 D1.2 D3.2 J1.2 J1.4 L1.2 R1.2 R2.2 U2.1
  other v1: 100,400 200,400 300,400 150,500 250,500 100,600 200,600 300,600 150,700 100,800 200,800 300,800 150,900 350,900 100,1000 200,1000 300,1000 150,1100 100,1200 200,1200 300,1200 150,1300 350,1300 950,1300 100,1400 200,1400 300,1400 800,1400 900,1400 150,1500 250,1500 950,1500 100,1600 200,1600 300,1600 500,1600 600,1600 700,1600 1000,1600
+25: KF1.1 R4.1
  other v1: 1500,400 1550,400 1600,400 1650,400 1700,400 1750,400 1800,400 1850,400 1900,400 1950,400 1525,450 1575,450 1625,450 1675,450 1725,450 1775,450 1825,450 1875,450 1925,450 1975,450 1500,500 1550,500 1600,500 1650,500 1700,500 1525,550 1575,550 1625,550 1675,550 1500,600 1550,600 1600,600 1650,600 1700,600 1525,650 1575,650 1625,650 1675,650 1500,700 1550,700 1600,700 1650,700 1700,700 1750,700 1800,700 1850,700 1900,700 1950,700 1525,750 1575,750 1625,750 1675,750 1725,750 1775,750 1825,750 1875,750 1925,750 1975,750 1500,800 1550,800 1600,800 1650,800 1700,800 1750,800 1800,800 1850,800 1900,800 1950,800 1525,850 1575,850 1625,850 1675,850 1500,900 1550,900 1600,900 1650,900 1525,950 1575,950 1625,950 1500,1000 1550,1000 1600,1000 1650,1000 1525,1050 1575,1050 1625,1050 1500,1100 1550,1100 1600,1100 1650,1100 1525,1150 1575,1150 1625,1150 1500,1200 1550,1200 1600,1200 1650,1200 1525,1250 1575,1250 1625,1250 1500,1300 1550,1300 1600,1300 1650,1300 1525,1350 1575,1350 1625,1350 1600,1400 1650,1400 1650,1500 1650,1600 1750,1600
+25_V: C2.2 C6.2 D5.C H1.2 KF2.1 Q1.2 R4.2 U1.7 | length 1859.5
  Top Layer w10: H1.2 889,296 1203,296 1419,512 1419,1430.51 1525.84,1537.35 1550.35,1537.35 1567.11,1554.11 C2.2
  other v1: 1750,1150 1800,1150 1850,1150 1900,1150 1950,1150 1800,1350 1850,1350 1900,1350 1950,1350 1825,1400 1875,1400 1925,1400 1975,1400 1800,1450 1850,1450 1900,1450 1950,1450 1975,1500 1800,1550 1850,1550 1900,1550 1950,1550 1875,1600 1925,1600 1975,1600 1550,1650 1600,1650 1850,1650 1900,1650 1950,1650 1625,1700 1675,1700 1775,1700 1825,1700 1875,1700 1925,1700 1975,1700 1650,1750 1700,1750 1800,1750 1850,1750 1900,1750 1950,1750 1675,1800 1825,1800 1875,1800 1925,1800 1975,1800
GND: C2.1 C3.2 C4.2 C5.1 C6.1 C7.2 C8.1 D1.1 D2.1 D3.1 D4.2 D6.1 D7.2 H1.3 J1.1 J1.3 KF1.2 KF2.2 Q1.1 R3.1 R5.1 U1.6 U1.9 U1.10 U1.11 U1.12 U1.13 U1.14 U1.15 U1.16 U1.17 U2.4 U2.5 U2.6 U2.7 U2.8
  other v1: 450,150 600,150 750,150 900,150 1050,150 1200,150 1500,150 1650,150 1800,150 1950,150 375,300 525,300 675,300 825,300 1425,300 1575,300 450,450 600,450 900,450 1050,450 1200,450 525,600 675,600 825,600 975,600 1125,600 1275,600 300,750 450,750 600,750 1050,750 1200,750 1350,750 675,900 1125,900 450,1050 600,1050 750,1050 900,1050 1050,1050 1200,1050 1350,1050 1800,1050 1950,1050 675,1200 1125,1200 450,1350 600,1350 525,1500 1425,1500 1200,1650 225,1800 375,1800 525,1800 675,1800 825,1800 975,1800 1275,1800 150,1950 300,1950 450,1950 600,1950 375,2100 525,2100
NetC1_1: C1.1 U1.1 | length 104.4
  Top Layer w10: C1.1 1143.88,1719.94 U1.1
NetC1_2: C1.2 D2.2 L1.1 U1.8
  other v1: 1400,1800 1150,1900 700,2000 1000,2000 1100,2000 1200,2000 750,2100 850,2100 950,2100 1050,2100 1150,2100 700,2200 800,2200 900,2200 1000,2200 1100,2200 1200,2200
NetC8_2: C8.2 D5.A Q1.3 R5.2
NetD4_1: D4.1 R2.1 | length 134.3
  Top Layer w10: D4.1 R2.1
NetD6_2: D6.2 L2.2 U2.2 | length 767.1
  Top Layer w10: U2.2 1251.21,1349.94 1260,1341.15 1260,1175.9 1199.04,1114.94 D6.2 1282.45,1015.86 L2.2
NetD7_1: D7.1 R6.1 | length 84.4
  Top Layer w15: D7.1 R6.1
NetR1_1: R1.1 R3.2 U1.4 | length 234.4
  Top Layer w10: R1.1 1091.3,1490 R3.2 1245.81,1490.26 U1.4
pads on no net: U1.2 U1.3 U1.5

## Polygon pours and split planes (outlines as drawn)
+25_V on Bottom Layer "+25_V_L02_P011" (solid, pour order 11): 2030,1165 2030,1835 1990,1875 1655,1875 1615,1835 1615,1710 1600,1695 1435,1695 1425,1685 1425,1655 1435,1645 1515,1645 1515,1586 1526,1575 1611.02,1575 1622.09,1586.09 1621.93,1657.91 1638.98,1675 1770,1675 1785,1660 1785,1385 1760,1360 1730,1360 1699.62,1329.62 1699.62,1130.38 1730,1100 1965,1100
GND on Bottom Layer "GND_L02_P017" (solid, pour order 17): 0,0 2045,0 2045,2310 0,2310
+25 on Bottom Layer "+25_L02_P013" (solid, pour order 13): 1635,1662 1757.56,1662 1774.56,1645 1774.56,1564 1760.56,1550 1684.37,1550 1688.38,895.96 1754.75,830 1949.56,830 2024.56,755 2024.56,440 1954.56,370 1635,370 1509.61,370 1445.75,433.77 1444.58,1380 1474.56,1410.01 1594.58,1410.01 1635,1450.44
+12 on Bottom Layer "+12_L02_P010" (solid, pour order 10): 1109,1577 1109,1714 1084,1739 79,1739 16,1676 16,1550 16,1178.77 16,775 16,399 65,350 350,350 400,400 400,605 370,635 200,635 175,660 175,750 200,775 366,775 400,809 400,1010 375,1035 205,1035 175,1065 175,1139.83 210.48,1175.61 367.04,1176.93 400,1210.17 400,1530 420,1550 825,1550 835,1540 835,1441.99 823.01,1430.09 740.73,1430.69 725.13,1415.2 725.13,1190.87 741,1175 942,1175 960.2,1193.2 960.2,1329.89 975.71,1345.42 1060,1345.51 1060,1365 1070,1375 1150,1375 1159.97,1384.97 1159.97,1430.03 1150.1,1439.9 1070.1,1439.9 1056,1454 1056,1542 1064,1550 1082,1550
NetC1_2 on Bottom Layer "NETC1_2_L02_P008" (solid, pour order 8): 1510,1705 1430,1705 1420,1715 1420,1755 1414.99,1760.01 1365.03,1759.99 1355.23,1769.75 1354.69,1895.34 1330.44,1919.52 1190,1919.52 1190,1765 1175,1750 1104.99,1750 1090.03,1764.99 1090.3,1919.52 679.42,1920.49 599.62,2000.59 600.12,2215.22 670.06,2285 1354.45,2285 1420,2285 1460,2285 1520,2225 1520,1715
NetC8_2 on Bottom Layer "NETC8_2_L02_P004" (solid, pour order 4): 2005,1885 1565,1885 1540,1910 1540,2060 1540,2264.96 1564.7,2289.73 1774.17,2290.22 1800.01,2264.45 1800.01,2060 2010,2060 2030,2040 2030,1910
+25_V on Top Layer "+25_V_L01_P000" (solid, pour order 0): 2011,1146 2011,1854 1990,1875 1655,1875 1615,1835 1615,1710 1600,1695 1435,1695 1425,1685 1425,1655 1435,1645 1515,1645 1515,1586 1526,1575 1611.02,1575 1622.09,1586.09 1621.93,1657.91 1638.98,1675 1770,1675 1785,1660 1785,1385 1760,1360 1730,1360 1699.62,1329.62 1699.62,1130.38 1730,1100 1965,1100
GND on Top Layer "GND_L01_P016" (solid, pour order 16): 0,0 2045,0 2045,2310 0,2310
+25 on Top Layer "+25_L01_P012" (solid, pour order 12): 1635.44,1662 1758,1662 1775,1645 1775,1564 1761,1550 1663.02,1550 1704.03,1550 1705.87,1380 1664.08,1380 1666.98,917.66 1755.18,830 1950,830 1988,792 1988,403 1955,370 1635.44,370 1510.04,370 1446.19,433.77 1445.02,1380 1475,1410.01 1595.01,1410.01 1635.44,1450.44
+12 on Top Layer "+12_L01_P009" (solid, pour order 9): 1109,1577 1109,1714 1084,1739 79,1739 16,1676 16,1550 16,1178.77 16,775 16,399 65,350 350,350 400,400 400,605 370,635 200,635 175,660 175,750 200,775 366,775 400,809 400,1010 375,1035 205,1035 175,1065 175,1139.83 210.48,1175.61 367.04,1176.93 400,1210.17 400,1530 420,1550 825,1550 835,1540 835,1441.99 823.01,1430.09 740.73,1430.69 725.13,1415.2 725.13,1190.87 741,1175 942,1175 960.2,1193.2 960.2,1329.89 975.71,1345.42 1060,1345.51 1060,1365 1070,1375 1150,1375 1159.97,1384.97 1159.97,1430.03 1150.1,1439.9 1070.1,1439.9 1056,1454 1056,1542 1064,1550 1082,1550
NetC1_2 on Top Layer "NETC1_2_L01_P005" (solid, pour order 5): 1510,1705 1430,1705 1420,1715 1420,1755 1414.99,1760.01 1365.03,1759.99 1355.23,1769.75 1354.69,1895.34 1330.44,1919.52 1190,1919.52 1190,1765 1175,1750 1104.99,1750 1090.03,1764.99 1090.3,1919.52 679.42,1920.49 599.62,2000.59 600.12,2215.22 670.06,2285 1354.45,2285 1420,2285 1460,2285 1520,2225 1520,1715
NetC8_2 on Top Layer "NETC8_2_L01_P003" (solid, pour order 3): 2005,1885 1565,1885 1540,1910 1540,2060 1540,2264.98 1564.69,2289.73 1774.74,2290.22 1800.01,2265.02 1800.01,2060 2010,2060 2016,2054 2016,1896

## Keep-outs
Keep-Out Layer:
  the board outline again, w10

## Text inside footprints (layer, text, board x,y; h text height)
U2: Top Overlay "*" at 1100.11,1416.94 h50; Mechanical 13 "*" at 1153.86,1372.44 h50